# Altium PCB Button.PcbDoc
Units mm, origin at the board's own origin, x right, y up, seen from the top; angles counter-clockwise.
Board outline 16 x 49 mm, 2 copper layers (Top Layer, Bottom Layer); 7 components, 8 nets, 40 pads, 0 vias.
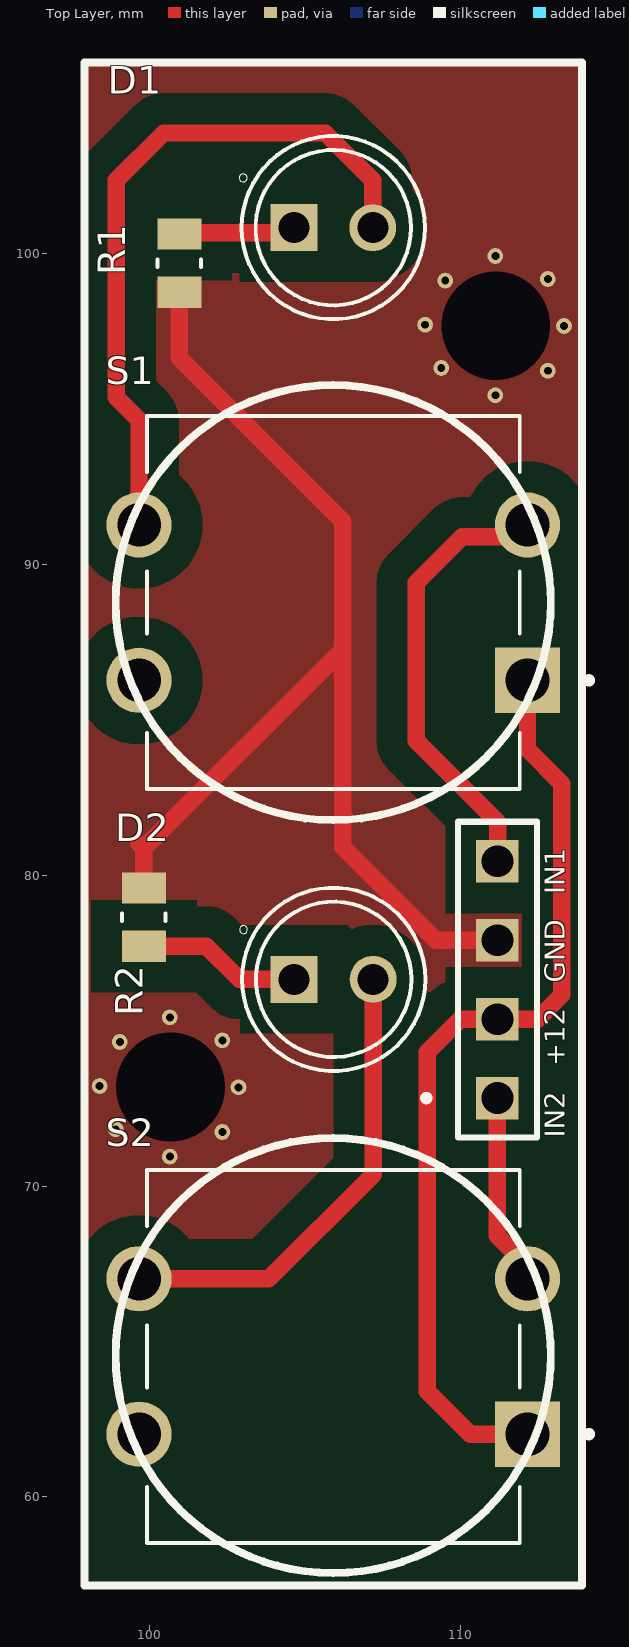
[diagram p0: Top Layer view]
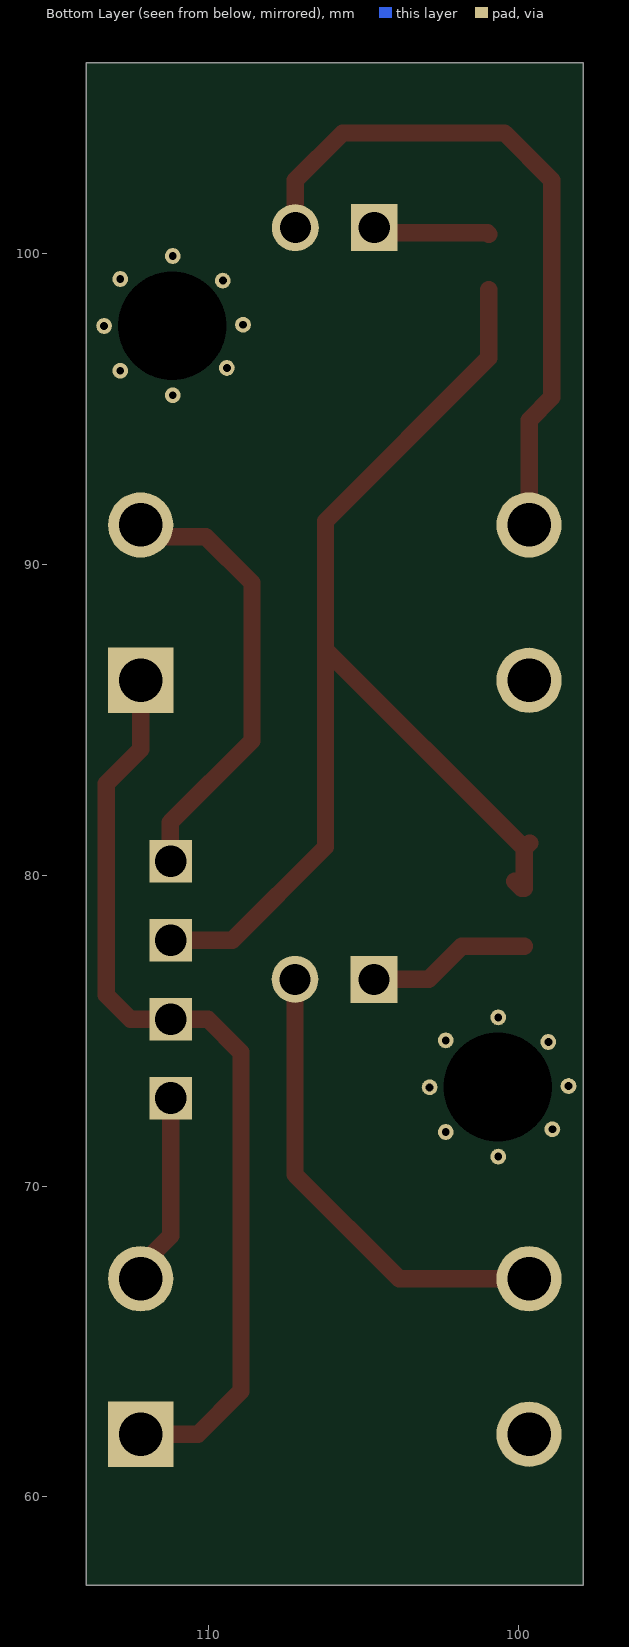
[diagram p1: Bottom Layer view, seen from below]
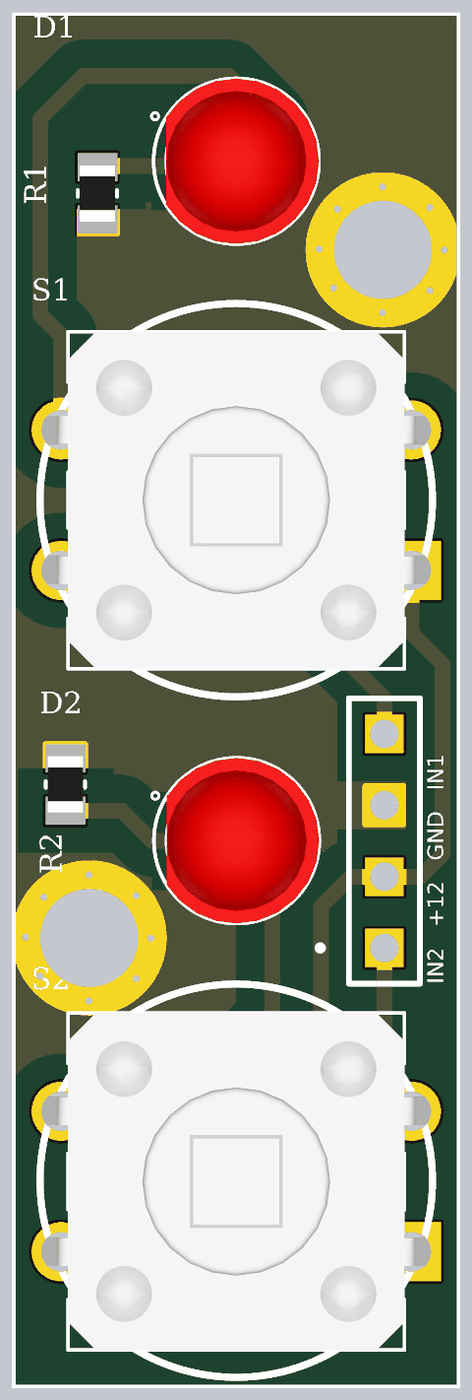
[diagram p2: 3D render of the assembled board from above, using the file's embedded part models]

## Layer stack, top to bottom
Top Solder: solder mask 0.0102, Solder Resist, Dk 3.5
Top Layer: signal copper 0.0356
Dielectric 1: dielectric 0.32, FR-4, Dk 4.8
Bottom Layer: signal copper 0.0356
Bottom Solder: solder mask 0.0102, Solder Resist, Dk 3.5

## Board outline
97.917,57.15 97.917,106.15 113.917,106.15 113.917,57.15

## Design rules (kind name [scope] priority, off if disabled: settings)
Clearance [All] p1: gap=0.254 ignorepadtopadclearanceinfootprint=FALSE except(0: Arc-Hole Track-Hole SMDPad-Hole THPad-Hole Via-Hole Fill-Hole Poly-Hole Region-Hole Text-Hole; 0.5: THPad-Via; 1: Arc-Fill Arc-Poly Arc-Region Track-Fill Track-Poly Track-Region SMDPad-Fill SMDPad-Poly SMDPad-Region THPad-Fill THPad-Poly THPad-Region Via-Fill Via-Poly Via-Region Fill-Fill Fill-Poly Fill-Region Poly-Poly Poly-Region Region-Region)
PolygonConnect [All] p1: connectstyle=Direct reliefconductorwidth=0.254 reliefentries=4 polygonreliefangle="90 Angle" airgapwidth=0.254
RoomDefinition Button [InComponentClass('Button')] p1: confinementstyle=ConfineIn formatcopy=TRUE lockcomponents=FALSE outline 97.917,57.15 114.427,57.15 114.427,106.172 97.917,106.172
RoutingVias [All] p1: holewidth=0.711 width=1.27 viastyle="Through Hole" minholewidth=0.711 minwidth=1.27 maxholewidth=0.711 maxwidth=1.27
SolderMaskExpansion [All] p1: expansion=0.102 istentingtop=FALSE
Width [All] p1: maxlimit=0.559 minlimit=0.254 preferedwidth=0.559 minimp=50.000000 maximp=50.000000 favimp=50.000000
30 further rules are at their usual default settings.

## Components (designator, comment, footprint, x,y, rotation, side; value= is the part's Value field where it differs from the comment)
D1 "WP7113ID" LED_WP7113ID 105.92,100.84 r0 top
D2 "WP7113ID" LED_WP7113ID 105.93,76.65 r0 top
"IN2   +12   GND   IN1" "JST-4Pin" 4Pin-M-Header_3MX1-254MM 111.2,72.83 r0 top (schematic designator J?)
R1 "1k" Resistor_0805 100.965,99.695 r270 top
R2 "1k" Resistor_0805 99.823,78.652 r90 top
S1 "TL1100F160Q" SW_TL1100F160Q 105.918,88.773 r180 top
S2 "TL1100F160Q" SW_TL1100F160Q 105.918,64.516 r180 top

## Footprints (in the part's own frame and the unit in brackets; to place one, negate y for a bottom-side part, rotate by r counter-clockwise, add the part's x,y. Pads: shape width x height; smd on the part's side, far side on the other; paste and mask are expansions set on the pad)
4Pin-M-Header_3MX1-254MM [mm]
  rect 1.37x1.37 hole 1.02: 1(0,0) 2(0,2.54) 3(0,5.08) 4(0,7.62)
  silkscreen extent -2.39,-1.27 1.27,8.89
LED_WP7113ID [mm]
  round 1.508 hole 1: A(1.27,0)
  rect 1.508x1.508 / inner round 1.508 / far side rect 1.508x1.508 hole 1: C(-1.27,0)
  silkscreen extent -3.03,-2.95 2.95,2.95, body extent -2.5,-2.95 2.95,2.95, height 9.6
Resistor_0805 [mm]
  rect 1x1.42 smd: 1(-0.935,0) 2(0.935,0)
  silkscreen extent -0.12,-0.7 0.12,0.7, body extent -1,-0.63 1,0.63, height 0.6
SW_TL1100F160Q [mm]
  rect 2.1x2.1 / inner round 2.1 / far side rect 2.1x2.1 hole 1.4: 1(-6.25,2.5)
  round 2.1 hole 1.4: 2(6.25,2.5) 3(-6.25,-2.5) 4(6.25,-2.5)
  silkscreen extent -8.32,-6 6,6, body extent -7.05,-6 7.05,6, height 7.3

## Part data
D1 D2: "Red 617nm LED Indication - Discrete 2V Radial", Package="Radial Kingbright", Availability="In Stock", Check_prices=https://www.snapeda.com/parts/WP7113ID/Kingbright/view-part/?ref=eda, MF=Kingbright, MP=WP7113ID, Price=None, Purchase-URL=https://pricing.snapeda.com/search/part/WP7113ID/?ref=eda, SnapEDA_Link=https://www.snapeda.com/parts/WP7113ID/Kingbright/view-part/?ref=snap
"IN2   +12   GND   IN1": "Connector Header Through Hole 4 position 0.098 (2.50mm)", Package=None, Check_prices=https://www.snapeda.com/parts/B4B-XH-A(LF)(SN)/JST+Sales+America+Inc./view-part/?ref=eda, MF="JST Sales", MP=B4B-XH-A(LF)(SN), SnapEDA_Link=https://www.snapeda.com/parts/B4B-XH-A(LF)(SN)/JST+Sales+America+Inc./view-part/?ref=snap
R1 R2: library part Resistor_0805, "Res 0805 330R 5% 125mW", Package="0805 Bourns", Check_prices=https://www.snapeda.com/parts/CR0805-JW-331ELF/Bourns/view-part/?ref=eda, MF=Bourns, MP=CR0805-JW-331ELF, SnapEDA_Link=https://www.snapeda.com/parts/CR0805-JW-331ELF/Bourns/view-part/?ref=snap
S1 S2: "Tactile Switch, TL1100 Series, SPST-NO, 12mm Top Actuated, 0.05A, 12VDC, PC", Package=None, Check_prices=https://www.snapeda.com/parts/TL1100F160Q/E-Switch/view-part/?ref=eda, MF=E-Switch, MP=TL1100F160Q, SnapEDA_Link=https://www.snapeda.com/parts/TL1100F160Q/E-Switch/view-part/?ref=snap

## Free pads (board coordinates)
  round 1.524 hole 3.5 mask+2: 3(100.676,73.187) 3(111.15,97.685)
  round 0.508 hole 0.254: 5(98.399,73.217) 5(98.919,71.827) 5(99.049,74.637) 5(100.659,70.947) 5(100.659,70.947) 5(100.659,75.427) 5(102.349,71.737) 5(102.349,74.687) 5(102.869,73.177) 5(108.873,97.716) 5(109.393,96.326) 5(109.523,99.136) 5(111.133,95.446) 5(111.133,95.446) 5(111.133,99.926) 5(112.823,96.236) 5(112.823,99.186) 5(113.343,97.676)

## Nets (pads, with @x,y where several pads share a name; then routed paths per layer and width w, separated by ;. In a path a pad name is that pad's centre, name@x,y a point inside that pad or via, vN(x,y) a via of type N, cw(c..) or ccw(c..) an arc to the next point about the centre after c; other vN are vias at no path point)
+12: "IN2   +12   GND   IN1.2" S1.1 S2.1 | length 30.4
  Top Layer w0.559: S2.1 110.323,62.016 108.94,63.399 108.94,74.31 110,75.37 111.2,75.37 112.493,75.37 113.27,76.147 113.27,82.95 112.168,84.052 S1.1
GND: "IN2   +12   GND   IN1.3" pad.3 pad.5 R1.2 R2.2 | length 37.2
  Top Layer w0.559: 99.65,81.04 99.823,80.867 R2.2 99.903,79.587 R2.2@100.124,79.808 ; 99.92,80.96 106.22,87.26 ; R1.2@100.965,98.837 100.965,96.647 106.22,91.392 106.22,87.26 ; 111.2,77.62 111.21,77.62 ; 111.2,77.91 109.22,77.91 106.22,80.91 106.22,87.26
IN_1: "IN2   +12   GND   IN1.4" S1.3 | length 14.5
  Top Layer w0.559: 111.21,80.16 111.21,81.7 108.585,84.325 108.585,89.408 110.069,90.892 S1.3@112.168,90.892
IN_2: "IN2   +12   GND   IN1.1" S2.3 | length 6.2
  Top Layer w0.559: 111.2,72.83 111.2,68.401 112.168,67.433 S2.3
NetD1_A: D1.A S1.4 | length 22.9
  Top Layer w0.559: S1.4@99.668,90.892 99.668,94.642 98.933,95.377 98.933,102.362 100.457,103.886 105.664,103.886 107.188,102.362 D1.A@107.188,100.711
NetD1_C: D1.C R1.1 | length 3.7
  Top Layer w0.559: R1.1 101.006,100.67 104.607,100.67 D1.C@104.648,100.711
NetD2_A: D2.A S2.4 | length 15.2
  Top Layer w0.559: S2.4 103.846,67.016 107.2,70.37 D2.A
NetD2_C: D2.C R2.1 | length 5.3
  Top Layer w0.559: R2.1 101.833,77.717 102.9,76.65 D2.C
pads on no net: S1.2 S2.2

## Polygon pours and split planes (outlines as drawn)
GND on Top Layer "GND_L01_P000" (solid, remove dead copper, pour order 0): 97.92,106.16 97.94,106.14 113.93,106.14 113.93,57.15 113.92,57.14 97.92,57.14 97.92,106.15
GND on Top Layer "GND_L01_P002" (solid, pour order 2): 97.93,76.06 99.63,76.06 100.1,76.53 102.02,76.53 104.51,74.04 104.51,72.57 102.51,70.57 99.33,70.57 99.33,70.61 97.92,72.02 97.92,76.11 97.87,76.16
GND on Top Layer "GND_L01_P001" (solid, pour order 1): 113.89,100.73 113.87,100.75 109.8,100.75 109.8,100.51 107.71,98.42 108.38,97.75 108.38,95.74 109.56,95.74 110.87,94.43 112.29,94.43 113.78,95.92 113.85,95.92 113.85,96.56 113.97,96.68 113.89,96.76 113.89,100.84

## Other copper
Top Layer:
  pour cut-out: 107.363,99.086 106.214,99.086 106.01,99.29 106.19,99.47 107.25,99.47 107.25,99.199

## Silkscreen, mask and mechanical layers (free items; w line width, h text height)
Top Overlay:
  circle w0.254: c105.917,88.773 r7
  circle w0.254: c105.917,64.545 r7
  lines w0.254: 97.917,57.15 113.917,57.15 113.917,106.15 97.917,106.15 97.917,57.15